# Altium PCB Lab_4.PcbDoc
Units mil, origin at the board's own origin, x right, y up, seen from the top; angles counter-clockwise.
Board outline 7000 x 4100 mil, 2 copper layers (Top Layer, Top, Bottom Layer, Bottom); 20 components, 14 nets, 58 pads, 0 vias.
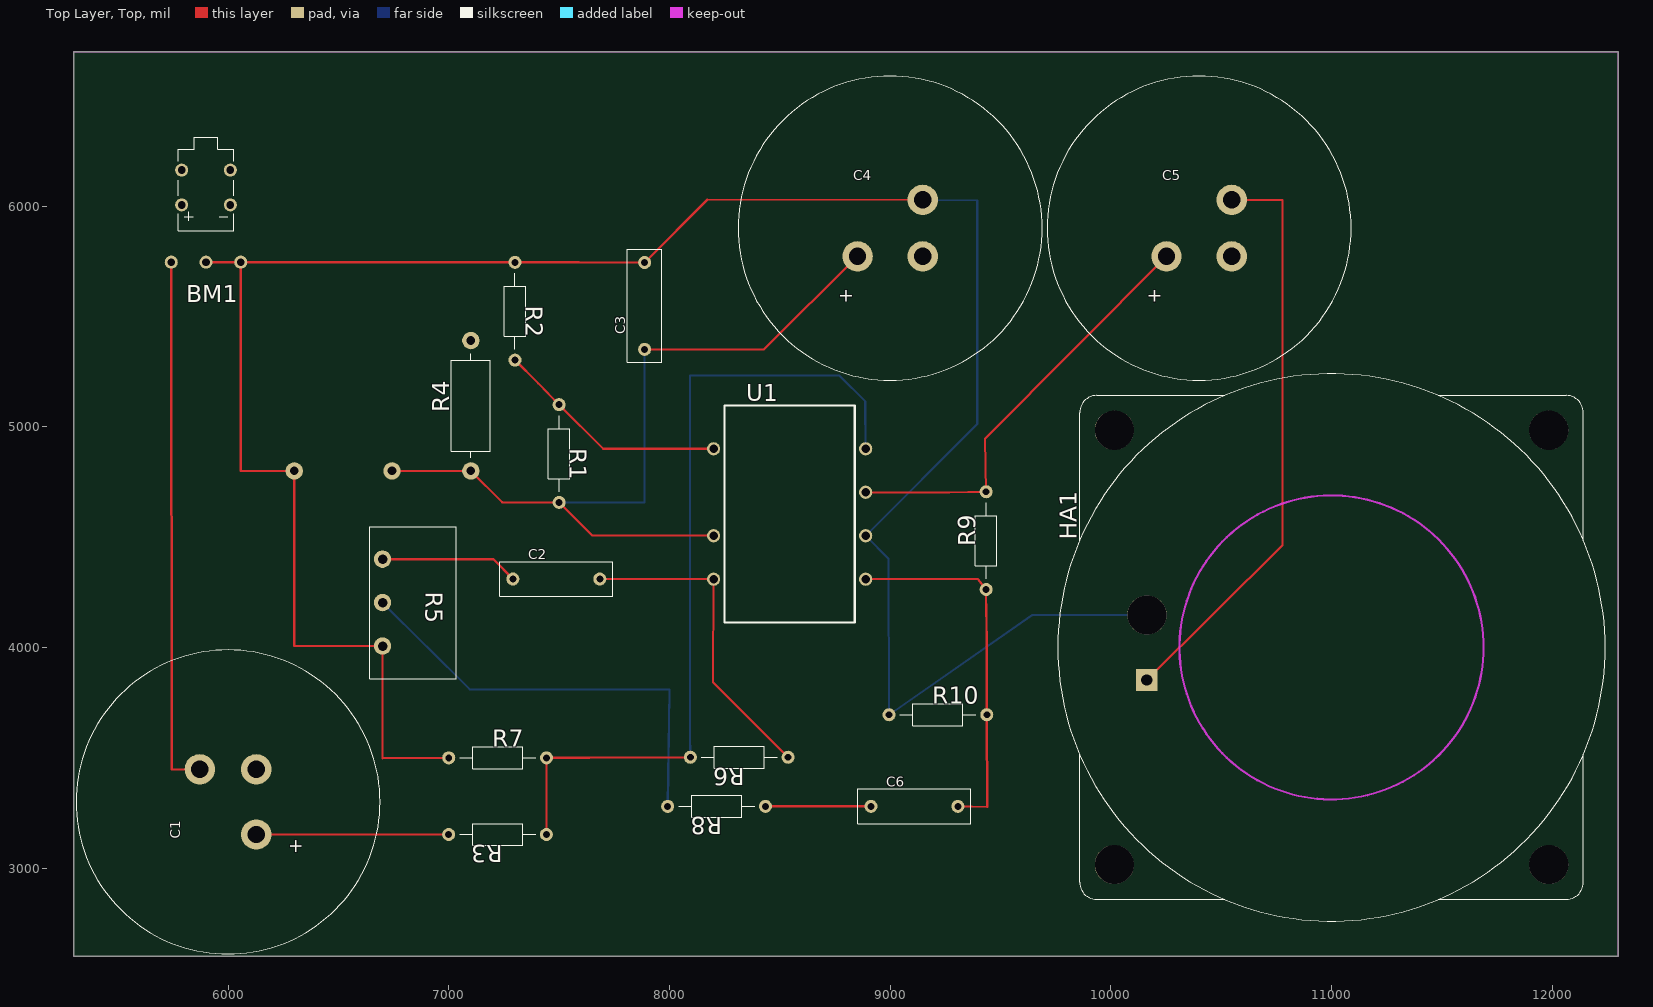
[diagram p0: Top Layer, Top view]
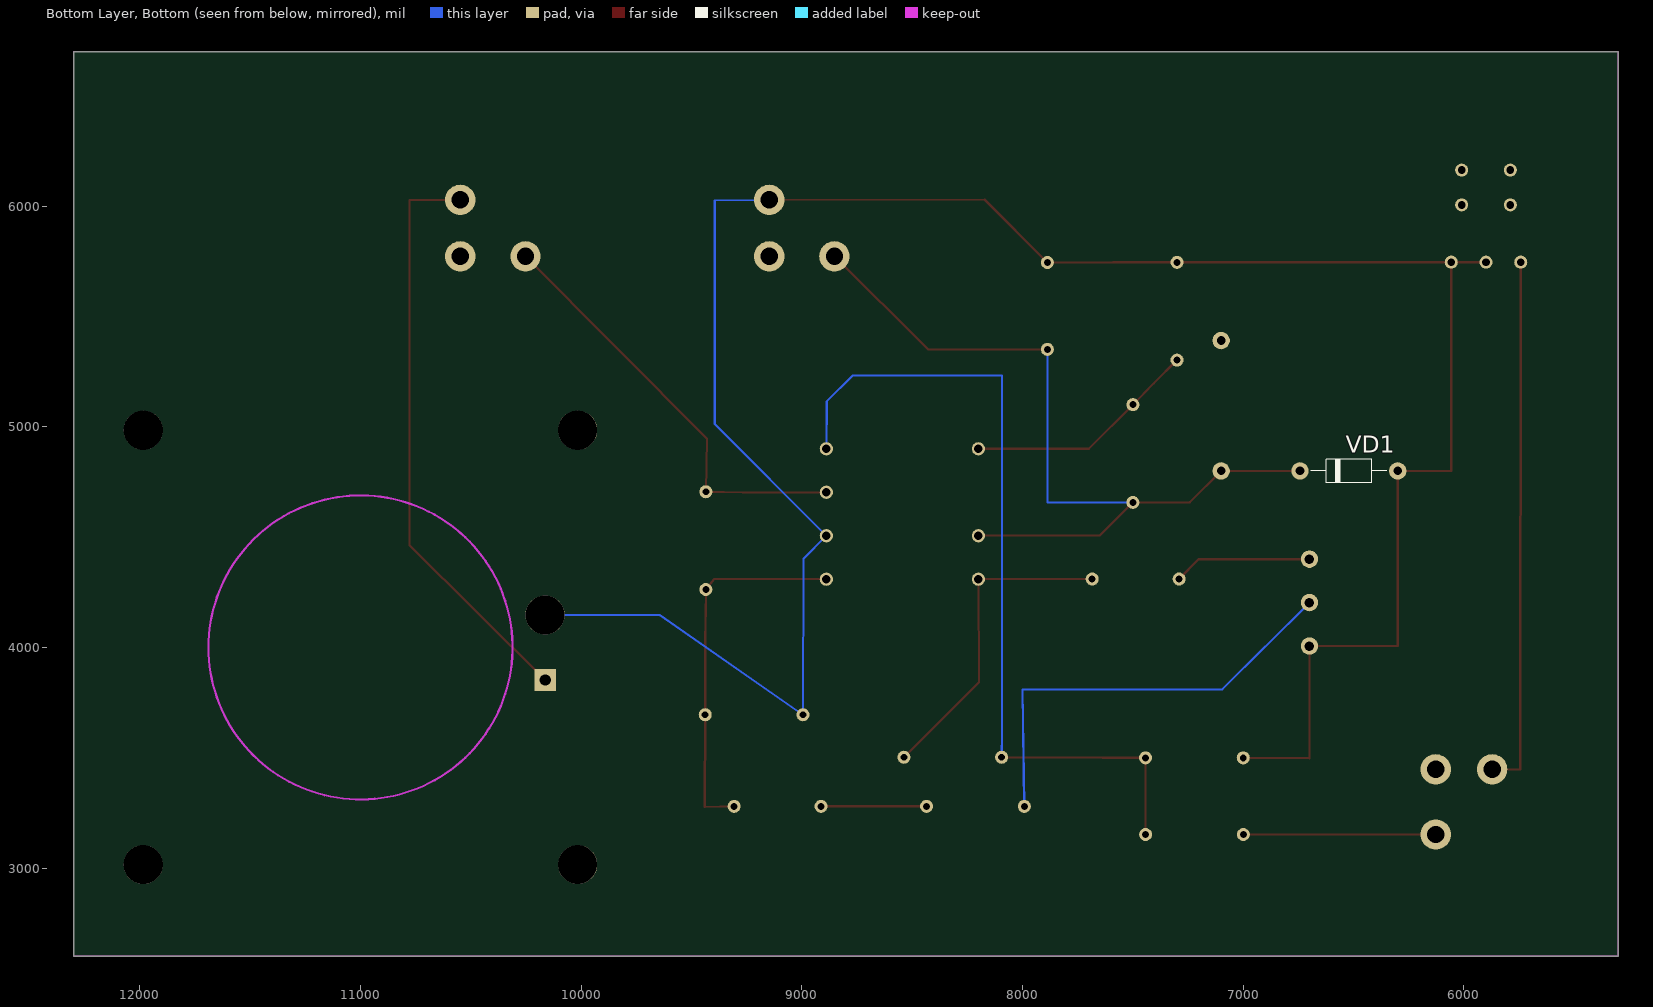
[diagram p1: Bottom Layer, Bottom view, seen from below]

## Layer stack, top to bottom
Top Solder, Top Mask: solder mask 0.4, Solder Resist, Dk 3.5
Top Layer, Top: signal copper 1.4
Dielectric 1: dielectric 12.6, FR-4, Dk 4.8
Bottom Layer, Bottom: signal copper 1.4
Bottom Solder, Bot Mask: solder mask 0.4, Solder Resist, Dk 3.5

## Board outline
5300,2600 12300,2600 12300,6700 5300,6700 5300,5000

## Design rules (kind name [scope] priority, off if disabled: settings)
Clearance [All] p1: gap=10 ignorepadtopadclearanceinfootprint=FALSE except(0: Arc-Hole Track-Hole SMDPad-Hole THPad-Hole Via-Hole Fill-Hole Poly-Hole Region-Hole Text-Hole; 12: Arc-Arc Arc-Track Arc-THPad Arc-Via Track-Track Track-THPad Track-Via THPad-THPad THPad-Via Via-Via)
PlaneClearance [All] p1: clearance=10
PolygonConnect [All] p1: connectstyle=Relief reliefconductorwidth=10 reliefentries=4 polygonreliefangle="90 Angle" airgapwidth=10
RoutingVias [All] p1: holewidth=28 width=50 viastyle="Through Hole" minholewidth=28 minwidth=50 maxholewidth=28 maxwidth=50
SolderMaskExpansion [All] p1: expansion=4 istentingtop=FALSE
Width [All] p1: maxlimit=10 minlimit=10 preferedwidth=10
29 further rules are at their usual default settings.

## Components (designator, comment, footprint, x,y, rotation, side; value= is the part's Value field where it differs from the comment)
BM1 "" M11 5900,6100 r180 top
C1 "1mk 6,3B" B43505-3550 6000,3300 r90 top
C2 "0,05mk" B32921(13X4) 7487.5,4310 r0 top
C3 "0,1mk" B32921(13X4) 7887.5,5547.5 r90 top
C4 "500mk 16B" B43505-3550 9000,5900 r0 top
C5 "10mk 16B" B43505-3550 10400,5900 r0 top
C6 "0,02mk" B32921(13X4) 9110,3280 r0 top
HA1 "" 0,25ÃÄ-10 11000,4000 r90 top
R1 "4,7M" C2-33H-0.125W 7500,5100 r270 top
R2 "4,7M" C2-33H-0.125W 7300,5745 r270 top
R3 "10k" C2-33H-0.125W 7442.5,3152.5 r180 top
R4 "82" C2-33H-0.5W_15MM 7100,4800 r90 top
R5 "100k" 16K1 6700,4400 r270 top
R6 "1M" C2-33H-0.125W 8537.5,3502.5 r180 top
R7 "2M" C2-33H-0.125W 7000,3500 r0 top
R8 "330k" C2-33H-0.125W 8435,3280 r180 top
R9 "2,2M" C2-33H-0.125W 9435,4262.5 r90 top
R10 "1M" C2-33H-0.125W 8995,3695 r0 top
U1 "" KC133A_KC133A(Primary) 8200,4900 r0 top
VD1 "" DO-41(DO-204AL) 6300,4800 r180 bottom

## Footprints (in the part's own frame and the unit in brackets; to place one, negate y for a bottom-side part, rotate by r counter-clockwise, add the part's x,y. Pads: shape width x height; smd on the part's side, far side on the other; paste and mask are expansions set on the pad)
0,25ÃÄ-10 [mm]
  rect 2.5x2.5 hole 1.3: 1(-3.75,21.25)
  round 4.5 hole 4.5: 2(3.75,21.25) 3(-25,25) 4(25,25) 5(25,-25) 6(-25,-25)
  Keep-Out Layer, Board circle w0.25: c0,0 r17.5
  silkscreen extent -31.5,-31.5 31.5,31.5
16K1 [mm]
  round 2 hole 1.1: 1(0,0) 2(10,0) 3(5,0)
  silkscreen extent -3.75,-1.5 13.75,8.5
B32921(13X4) [mm]
  round 1.5 hole 0.8: 1(-5,0) 2(5,0)
  silkscreen extent -6.5,-2 6.5,2
B43505-3550 [mm]
  round 3.5 hole 2: 1(-3.75,-3.25) 2(3.75,3.25) 3(3.75,-3.25)
  silkscreen extent -17.5,-17.5 17.5,17.5
C2-33H-0.5W_15MM [mm]
  round 2 hole 1: 1(0,0) 2(15,0)
  silkscreen extent 1.5,-2.25 13.5,2.25
C2-33H-0.125W [mm]
  round 1.5 hole 0.8: 1(0,0) 2(11.25,0)
  silkscreen extent 1.25,-1.25 10,1.25
DO-41(DO-204AL) [mm]
  round 2 hole 1: 1(0,0) 2(-11.25,0)
  silkscreen extent -10,-1.35 -1.25,1.35
KC133A_KC133A(Primary) [mil]
  round 60 hole 38: 1(0,-590.55) 2(688.98,-590.55) 3(0,0) 4(688.98,-393.7) 5(688.98,-196.85) 7(0,-393.7) 8(688.98,0)
  silkscreen extent 49,-787 640,197
M11 [mm]
  round 1.5 hole 0.9: 1(0,9) 2(-4,9) 3(4,9) 4(-2.8,2.4) 5(2.8,2.4) 6(-2.8,-1.6) 7(2.8,-1.6)
  silkscreen extent -3.18,-5.38 3.18,5.38

## Nets (pads, with @x,y where several pads share a name; then routed paths per layer and width w, separated by ;. In a path a pad name is that pad's centre, name@x,y a point inside that pad or via, vN(x,y) a via of type N, cw(c..) or ccw(c..) an arc to the next point about the centre after c; other vN are vias at no path point)
+5B: R4.2
GND: BM1.1 BM1.2 C3.2 C4.2 HA1.2 R2.1 R5.2 R7.1 R10.1 U1.4 VD1.1 | length 10695.8
  Top Layer, Top w10: BM1.1 5977.5,5745 BM1.2 ; R7.1 6700,3497.5 R5.2 6300,4007.5 VD1.1 6057.5,4800 BM1.2 ; C4.2 8172.5,6030 C3.2 7590,5745 R2.1 6622.5,5745 BM1.2
  Bottom Layer, Bottom w10: C4.2 9395,6025 9395,5012.5 U1.4 8992.5,4402.5 R10.1 9645,4147.5 HA1.2
NET00004: R1.1 R2.2 U1.3 | length 1067.2
  Top Layer, Top w10: R2.2 7405,5197.5 R1.1 7700,4900 U1.3
NET00007: C2.2 R6.1 U1.1 | length 1463.4
  Top Layer, Top w10: C2.2 7945,4310 U1.1 8197.5,3842.5 R6.1
NET00009: R3.1 R6.2 R7.2 U1.8 | length 3787.9
  Top Layer, Top w10: R3.1 7442.5,3242.5 R7.2 7637.5,3500 R6.2
  Bottom Layer, Bottom w10: R6.2 8092.5,3615 8092.5,5232.5 8770,5232.5 8887.5,5115 U1.8
NET00010: C6.2 R9.1 R10.2 U1.2 | length 1687.2
  Top Layer, Top w10: U1.2 9397.5,4310 R9.1 9437.5,4012.5 R10.2 9440,3277.5 C6.2
NET00012: C3.1 C4.1 R1.2 R4.1 U1.7 VD1.2 | length 3797.5
  Top Layer, Top w10: VD1.2 R4.1 7242.5,4657.5 R1.2 7650,4507.5 U1.7 ; C3.1 8427.5,5350 C4.1
  Bottom Layer, Bottom w10: R1.2 7887.5,4657.5 C3.1
NET00013: C1.1 R3.2 | length 871.6
  Top Layer, Top w10: C1.1 6215,3152.5 R3.2
NET00014: BM1.3 C1.2 | length 2425.2
  Top Layer, Top w10: BM1.3 5745,3447.5 C1.2
NET00016: C5.1 R9.2 U1.5 | length 1952
  Top Layer, Top w10: U1.5 9267.5,4702.5 R9.2 9430,4945 C5.1
NET00017: C5.2 HA1.1 | length 2660.5
  Top Layer, Top w10: HA1.1 10777.5,4462.5 10777.5,6027.5 C5.2
NET00018: C6.1 R8.1 | length 478.1
  Top Layer, Top w10: R8.1 C6.1
NET00019: C2.1 R5.1 | length 628.5
  Top Layer, Top w10: R5.1 7202.5,4400 C2.1
NET00020: R5.3 R8.2 | length 1992.4
  Bottom Layer, Bottom w10: R5.3 7095,3810 8000,3810 R8.2
pads on no net: BM1.4 BM1.5 BM1.6 BM1.7 C1.3 C4.3 C5.3 HA1.3 HA1.4 HA1.5 HA1.6

## Keep-outs
Keep-Out Layer, Board:
  the board outline again, w5

## Text inside footprints (layer, text, board x,y; h text height)
C1: Top Overlay, Top Silk "+" at 6334.65,3063.78 h62.5 r90; Mechanical 1, Top Assy "+" at 6334.65,3063.78 h62.5 r90
C4: Top Overlay, Top Silk "+" at 8763.78,5565.35 h62.5; Mechanical 1, Top Assy "+" at 8763.78,5565.35 h62.5
C5: Top Overlay, Top Silk "+" at 10163.78,5565.35 h62.5; Mechanical 1, Top Assy "+" at 10163.78,5565.35 h62.5